# Altium PCB SL1 Xilinx Spartan-IIE PQ208 Rev1.01.PcbDoc (part 2 of 3)
Units mil, origin at the board's own origin, x right, y up, seen from the top; angles counter-clockwise.
Board outline 7087.04 x 1988.61 mil, 2 copper layers (Top Layer, Bottom Layer), stack 64.8 mil thick; 115 components, 126 nets, 642 pads, 225 vias.
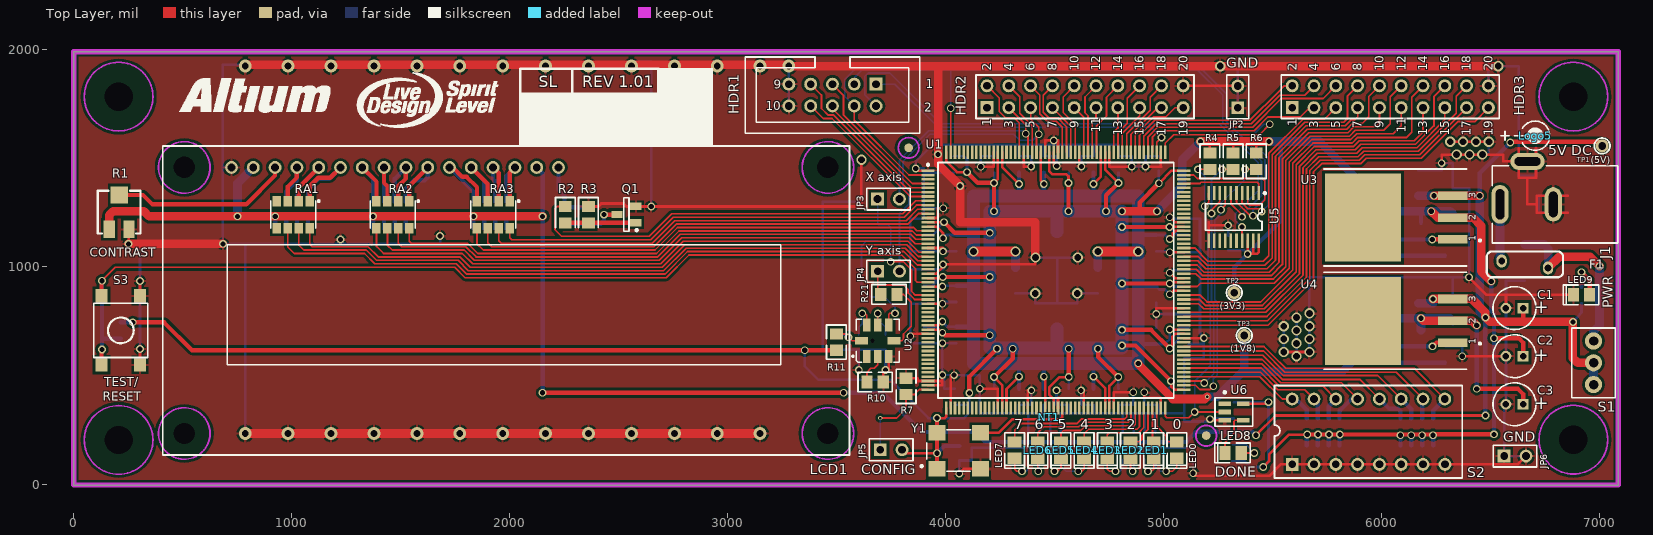
[diagram p0: Top Layer view]

## Via types
v1: diameter 35.43, hole 23.62, Top Layer to Bottom Layer, tented both sides, 166 vias
v2: diameter 59.06, hole 31.5, Top Layer to Bottom Layer, tented both sides, 27 vias
v3: diameter 47.24, hole 31.5, Top Layer to Bottom Layer, 18 vias
v4: diameter 47.24, hole 31.5, Top Layer to Bottom Layer, tented both sides, 11 vias
v5: diameter 19.68, hole 11.81, Top Layer to Bottom Layer, tented both sides, 2 vias
v6: diameter 35.43, hole 23.62, Top Layer to Bottom Layer, 1 vias

## Nets (pads, with @x,y where several pads share a name; then routed paths per layer and width w, separated by ;. In a path a pad name is that pad's centre, name@x,y a point inside that pad or via, vN(x,y) a via of type N, cw(c..) or ccw(c..) an arc to the next point about the centre after c; other vN are vias at no path point) (continued)
JTAG_NEXUS_TMS: (continued)
  Top Layer w7.87: HDR1.8@3381.1,1738.58 3438.59,1681.1 3479.34,1681.1 3836.61,1323.82 U1.7@3919.29,1323.82
LCD_CONTRAST: LCD1.3 R1.W | length 825.3
  Top Layer w19.68: R1.W@208.66,1330.71 318.9,1330.71 362.2,1287.4 791.87,1287.4 924.41,1419.95 LCD1.3@924.41,1456.69
LCD_DB0: RA2.5 U1.20 | length 2710
  Top Layer w7.87: RA2.5@1389.57,1178.16 1389.57,1094.49 1422.05,1062.01 1783.46,1062.01 1830.71,1014.76 2693.3,1014.76 2796.64,1118.11 3827.76,1118.11 3877.95,1067.91 U1.20@3919.29,1067.91
LCD_DB1: RA2.6 U1.18 | length 2640.6
  Top Layer w7.87: RA2.6@1439.57,1178.16 1439.57,1099.8 1461.61,1077.76 1791.34,1077.76 1838.58,1030.51 2686.78,1030.51 2790.12,1133.86 3834.28,1133.86 3860.85,1107.28 U1.18@3919.29,1107.28

## Text inside footprints (layer, text, board x,y; h text height)
U3: Top Overlay "1" at 6431.75,1118.87 h31.5 r90; Top Overlay "3" at 6432.73,1314.74 h31.5 r90; Top Overlay "2" at 6431.23,1213.88 h31.5 r90
U4: Top Overlay "2" at 6431.23,740.65 h31.5 r90; Top Overlay "3" at 6432.73,841.51 h31.5 r90; Top Overlay "1" at 6431.75,645.65 h31.5 r90